# EAGLE board Pendant (EAGLE 7.7.0)
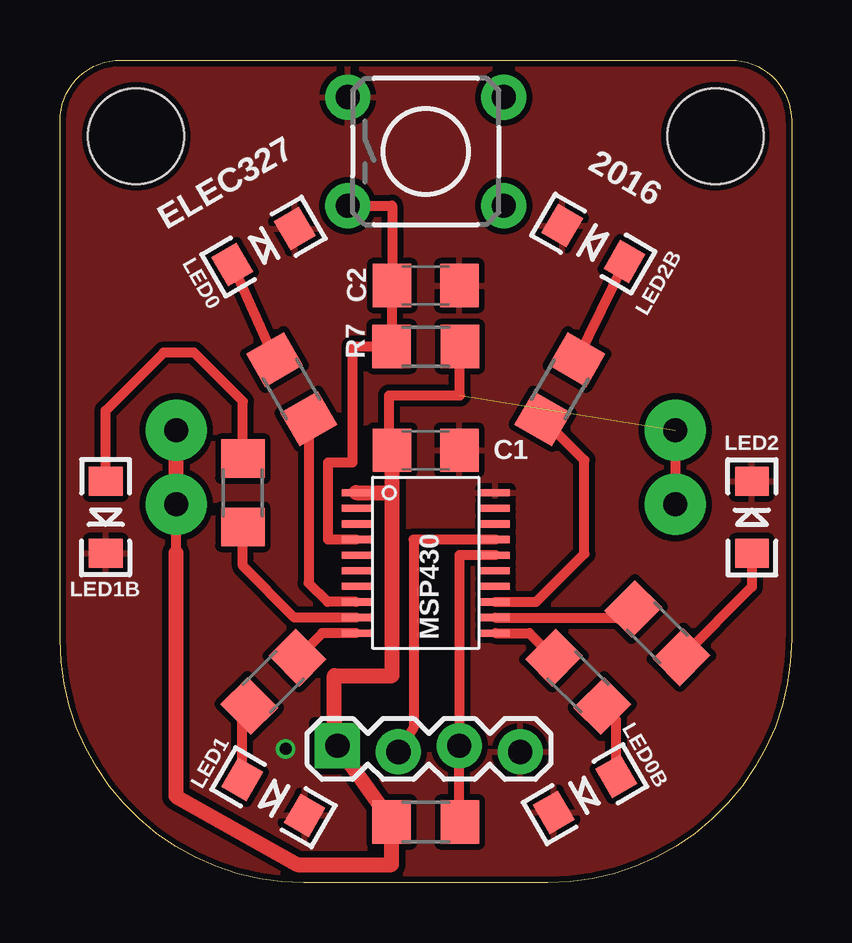
[diagram p0: board, top side]
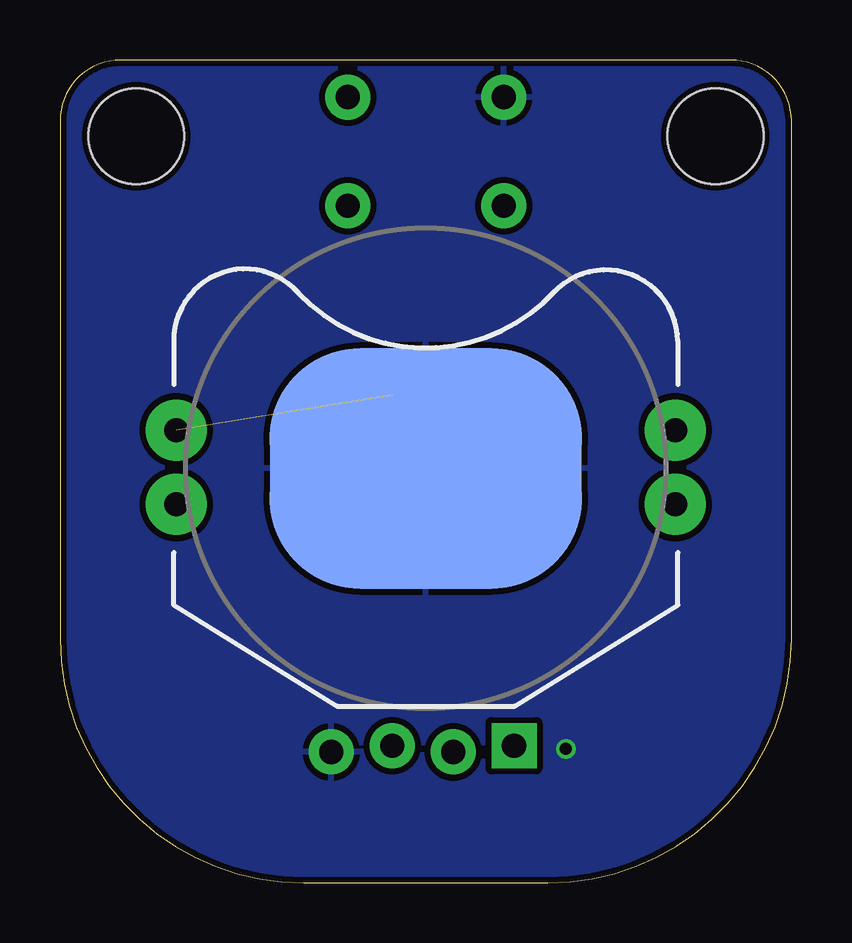
[diagram p1: board, bottom side, seen from below]

Size 30.48 x 34.29 mm. Coordinates in mm from the lower left corner, seen from the top.
Outline: 2.54,34.29 27.94,34.29 arc-90 30.48,31.75 30.48,10.16 arc-90 20.32,0 10.16,0 arc-90 0,10.16 0,31.75 arc-90 2.54,34.29
Copper layers (1*16): Top 0.035mm / dielectric 1.5mm / Bottom 0.035mm
Design rules "SeeedStudio_2layer_DRU_no_angle_20140221": minimum track width 6mil, minimum drill 12mil, track to track 6mil, track to pad 6mil, pad to pad 6mil, via to via 6mil, smd to smd 0mil, copper to edge 10mil, drill to drill 10mil, minimum pad ring 10mil, minimum via ring 6mil, stop-mask expansion 2mil, vias tented up to drill 100mil, thermal gap 10mil
Holes 4 mm at 3.17,31.11 27.3,31.11

## Footprints (pad centres in the part's own frame; a part is rotated, then mirrored left to right if it is on the bottom)
BATTCON_20MM_PTH_COMPACT = drill 1 pad 2.54: 1 -10.4,1.6; 3 10.4,1.6; 4 10.4,-1.5; 5 -10.4,-1.5 | smd 13 x 10: 2 0,0
C1206 = smd 1.6 x 1.8: 1 -1.4,0; 2 1.4,0
1X04_LOCK = drill 1.016 pad 1.88 square: 1 0,0.127 | drill 1.016 pad 1.88: 2 2.54,-0.127; 3 5.08,0.127; 4 7.62,-0.127
LED-1206 = smd 1.2 x 1.4: A -1.5,0; C 1.5,0
20_PIN = smd 0.3 x 1.2: 1 -2.925,-2.9; 2 -2.275,-2.9; 3 -1.625,-2.9; 4 -0.975,-2.9; 5 -0.325,-2.9; 6 0.325,-2.9; 7 0.975,-2.9; 8 1.625,-2.9; 9 2.275,-2.9; 10 2.925,-2.9; 11 2.925,2.9; 12 2.275,2.9; 13 1.625,2.9; 14 0.975,2.9; 15 0.325,2.9; 16 -0.325,2.9; 17 -0.975,2.9; 18 -1.625,2.9; 19 -2.275,2.9; 20 -2.925,2.9
R1206 = smd 1.6 x 1.803: 1 -1.422,0; 2 1.422,0
TACTILE_SWITCH_PTH_6.0MM = drill 1.016 pad 1.88: 1 -3.251,2.261; 2 3.251,2.261; 3 -3.251,-2.261; 4 3.251,-2.261

## Placement (x,y rotation side)
BAT1  20mm coincell  [BATTCON_20MM_PTH_COMPACT]  15.24,17.27 0 bottom
C1  10u  [C1206]  15.24,18.03 0 top
C2  470nF  [C1206]  15.24,24.89 180 top
JP1  [1X04_LOCK]  11.56,5.59 0 top
LED0  [LED-1206]  8.48,26.51 30 top
LED0B  [LED-1206]  21.88,3.7 210 top
LED1  [LED-1206]  8.89,3.57 330 top
LED1B  [LED-1206]  1.91,15.24 270 top
LED2  [LED-1206]  28.83,15.24 90 top
LED2B  [LED-1206]  22.22,26.64 150 top
MSP430  MSP  [20_PIN]  15.24,13.34 270 top
R1  [R1206]  9.65,20.57 300 top
R2  [R1206]  7.62,16.26 270 top
R3  [R1206]  8.89,8.38 45 top
R4  [R1206]  21.59,8.38 315 top
R5  [R1206]  24.89,10.41 315 top
R6  [R1206]  20.83,20.57 60 top
R7  [R1206]  15.24,22.35 0 top
R_PULLUP_RST  43k  [R1206]  15.24,2.54 180 top
S1  MOMENTARY-SWITCH-SPST-PTH-6.0MM  [TACTILE_SWITCH_PTH_6.0MM]  15.24,30.48 0 top

## Library data of the parts
BAT1 = Battery
C1 C2 R1-R7 R_PULLUP_RST = rcl
JP1 = Pendant
LED0 LED0B LED1 LED1B LED2 LED2B = SparkFun-LED
MSP430 = RatDBS
S1 = SparkFun-Switches; PROD_ID: SWCH-08441; SF_SKU: COM-00097

## Nets
_RST: JP1.3 MSP430.16 R_PULLUP_RST.1
GND: BAT1.2 C1.2 C2.1 JP1.4 LED0.C LED0B.C LED1.C LED1B.C LED2.C LED2B.C MSP430.20 S1.1
N$1: MSP430.12 R5.1
N$2: MSP430.11 R4.1
N$3: LED2.A R5.2
N$4: LED0B.A R4.2
N$5: MSP430.13 R6.1
N$6: MSP430.7
N$7: LED0.A R1.1
N$8: LED1B.A R2.1
N$9: LED2B.A R6.2
N$10: LED1.A R3.1
N$11: MSP430.8 R1.2
N$12: MSP430.9 R2.2
N$13: MSP430.10 R3.2
N$14: C2.2 MSP430.4 R7.1 S1.3
TEST: JP1.2 MSP430.17
VDD: BAT1.1 BAT1.3 BAT1.4 BAT1.5 C1.1 JP1.1 MSP430.1 R7.2 R_PULLUP_RST.2

## Tracks (layer width: path | path; a pad name or v marks a point on that pad's centre or on a via)
_RST
  Top 0.406: MSP430.16 16.64,13.66 JP1.3 16.64,2.54 R_PULLUP_RST.1
GND  (via drill 0.5)
  other vias: 9.4,5.59
  pour Bottom (isolate 0.254): 30.48,31.75 30.48,10.16 arc-90 20.32,0 10.16,0 arc-90 0,10.16 0,31.75 arc-90 2.54,34.29 27.94,34.29 arc-90
  pour Top (isolate 0.254): 30.48,31.75 30.48,10.16 arc-90 20.32,0 10.16,0 arc-90 0,10.16 0,31.75 arc-90 2.54,34.29 27.94,34.29 arc-90
N$1
  Top 0.406: MSP430.12 23.53,11.06 R5.1
N$2
  Top 0.406: MSP430.11 19.56,10.41 R4.1
N$3
  Top 0.406: LED2.A 28.83,12.34 R5.2
N$4
  Top 0.406: LED0B.A 23.18,6.8 R4.2
N$5
  Top 0.406: MSP430.13 19.84,11.71 21.84,13.72 21.84,17.62 R6.1
N$7
  Top 0.406: LED0.A R1.1
N$8
  Top 0.406: LED1B.A 1.91,19.68 4.32,22.1 5.59,22.1 7.62,20.07 R2.1
N$9
  Top 0.406: LED2B.A R6.2
N$10
  Top 0.406: LED1.A 7.59,7.08 R3.1
N$11
  Top 0.406: MSP430.8 11.15,11.71 10.36,12.5 R1.2
N$12
  Top 0.406: MSP430.9 9.77,11.06 7.62,13.21 R2.2
N$13
  Top 0.406: MSP430.10 10.92,10.41 R3.2
N$14
  Top 0.406: MSP430.4 11.18,14.31 11.18,17.53 12.19,17.53 12.19,22.35 R7.1 13.84,22.35 C2.2 13.84,28.22 S1.3
TEST
  Top 0.406: MSP430.17 14.73,14.31 14.73,6.48 JP1.2
VDD  (1 unrouted)
  Top 0.406: BAT1.1 BAT1.5 | JP1.1 11.43,6.73 | BAT1.4 4.83,13.74 | C1.1 13.72,18.03 13.72,20.32 16.66,20.32 R7.2
  Top 0.635: MSP430.1 13.84,16.26 | 13.84,16.26 C1.1 | 13.84,16.26 13.84,8.64 11.43,8.64 11.43,6.73 | JP1.1 R_PULLUP_RST.2 13.82,0.76 9.91,0.76 4.83,3.62 4.83,13.74 | BAT1.4 BAT1.3

## Text on the board
tPlace: 2016 | ELEC327 | MSP430
tDocu: V T R G